# EAGLE board Minimum circuit for arduino (EAGLE 6.5.0)

Size 100 x 80 mm. Coordinates in mm from the lower left corner, seen from the top.
Outline: 0,0 100,0 100,80 0,80 0,0
Copper layers (1*16): Top 0.035mm / dielectric 1.5mm / Bottom 0.035mm
Design rules "default": minimum track width 10mil, minimum drill 24mil, track to track 8mil, track to pad 8mil, pad to pad 8mil, via to via 8mil, smd to smd 8mil, copper to edge 40mil, drill to drill 8mil, minimum pad ring 10mil, minimum via ring 8mil, stop-mask expansion 4mil, vias tented up to drill 0mil, thermal gap 10mil
Net classes: 0 default: width 0.254 mm, clearance 0.254 mm; 1 power: width 0.61 mm, drill 0.61 mm, clearance 0.254 mm; 2 gnd: width 0.305 mm, drill 0.559 mm, clearance 0.254 mm; 3 usbvcc: width 0.508 mm, drill 0.61 mm, clearance 0.254 mm; 4 aref: width 0.406 mm, drill 0.61 mm, clearance 0.254 mm

## Footprints (pad centres in the part's own frame; a part is rotated, then mirrored left to right if it is on the bottom)
C2.5-6 = drill 0.813 pad 1.6 octagon: 1 -1.27,0; 2 1.27,0
C2.5-5 = drill 0.813 pad 1.6 octagon: 1 -1.27,0; 2 1.27,0
C2.5-4 = drill 0.813 pad 1.6 octagon: 1 -1.27,0; 2 1.27,0
TO220H = drill 1.118 long: 1 -2.54,-10.16; 2 0,-10.16; 3 2.54,-10.16 | hole 3.302: 0,4.826
DCJ0202 = drill 1 pad 2 long: 1 0,3.1; 2 4.8,0; 3 0,-3
1X03 = drill 1.016 long: 1 -2.54,0; 2 0,0; 3 2.54,0
1X08 = drill 1.016 long: 1 -8.89,0; 2 -6.35,0; 3 -3.81,0; 4 -1.27,0; 5 1.27,0; 6 3.81,0; 7 6.35,0; 8 8.89,0
1X06 = drill 1.016 long: 1 -6.35,0; 2 -3.81,0; 3 -1.27,0; 4 1.27,0; 5 3.81,0; 6 6.35,0
2X03 = drill 1.016 octagon: 1 -2.54,-1.27; 2 -2.54,1.27; 3 0,-1.27; 4 0,1.27; 5 2.54,-1.27; 6 2.54,1.27
LED5MM = drill 0.813 octagon: A -1.27,0; K 1.27,0
0309/12 = drill 0.813 octagon: 1 -6.35,0; 2 6.35,0
0207/10 = drill 0.813 octagon: 1 -5.08,0; 2 5.08,0
B3F-10XX = drill 1.016 long: 1 -3.251,2.261; 2 3.251,2.261; 3 -3.251,-2.261; 4 3.251,-2.261
PN61729-S = drill 0.95 octagon: 1 1.25,4.71; 2 -1.25,4.71; 3 -1.25,2.71; 4 1.25,2.71 | drill 2.3 pad 2.9: S1 -6.02,0; S2 6.02,0
DIL28-3 = drill 0.85 pad 1.422 long: 1 -16.51,-3.81; 2 -13.97,-3.81; 3 -11.43,-3.81; 4 -8.89,-3.81; 5 -6.35,-3.81; 6 -3.81,-3.81; 7 -1.27,-3.81; 8 1.27,-3.81; 9 3.81,-3.81; 10 6.35,-3.81; 11 8.89,-3.81; 12 11.43,-3.81; 13 13.97,-3.81; 14 16.51,-3.81; 15 16.51,3.81; 16 13.97,3.81; 17 11.43,3.81; 18 8.89,3.81; 19 6.35,3.81; 20 3.81,3.81; 21 1.27,3.81; 22 -1.27,3.81; 23 -3.81,3.81; 24 -6.35,3.81; 25 -8.89,3.81; 26 -11.43,3.81; 27 -13.97,3.81; 28 -16.51,3.81

## Placement (x,y rotation side)
C1  [C2.5-6]  -34.29,45.72 0 top  (outside the outline)
C2  [C2.5-6]  -43.18,45.72 0 top  (outside the outline)
C3  [C2.5-5]  -15.24,44.45 0 top  (outside the outline)
C4  [C2.5-5]  -20.32,44.45 0 top  (outside the outline)
C5  [C2.5-5]  -25.4,44.45 0 top  (outside the outline)
C6  100n  [C2.5-4]  -16.51,38.1 0 top  (outside the outline)
IC1  7805T  [TO220H]  -21.59,12.7 0 top  (outside the outline)
J1  DCJ0202  [DCJ0202]  -52.07,11.43 0 top  (outside the outline)
JP1  [1X03]  -50.8,57.15 0 top  (outside the outline)
JP2  [1X08]  -24.13,50.8 0 top  (outside the outline)
JP3  [1X06]  -21.59,57.15 0 top  (outside the outline)
JP4  [1X08]  -45.72,50.8 0 top  (outside the outline)
JP5  [1X06]  -38.1,57.15 0 top  (outside the outline)
JP6  [2X03]  66.04,39.37 270 top
LED1  [LED5MM]  -36.83,38.1 0 top  (outside the outline)
LED5  [LED5MM]  -49.53,38.1 0 top  (outside the outline)
LED6  [LED5MM]  -62.23,38.1 0 top  (outside the outline)
R1  [0309/12]  -20.32,63.5 0 top  (outside the outline)
R2  [0207/10]  -34.29,62.23 0 top  (outside the outline)
R6  [0207/10]  -46.99,62.23 0 top  (outside the outline)
R7  [0207/10]  -59.69,62.23 0 top  (outside the outline)
RESET  [B3F-10XX]  -59.69,25.4 0 top  (outside the outline)
X1  PN61729-S  [PN61729-S]  -38.1,11.43 0 top  (outside the outline)
ZU4  ATMEGA328P-PU  [DIL28-3]  43.18,30.48 180 top

## Library data of the parts
C1-C6 = capacitor-wima
IC1 = linear
J1 = con-jack; OC_FARNELL: unknown; OC_NEWARK: unknown
JP1-JP6 = pinhead
LED1 LED5 LED6 = led
R1 R2 R7 = rcl
R6 = resistor
RESET = switch-omron; MPN: B3F-1000; OC_FARNELL: 176432; OC_NEWARK: 36M3542
X1 = con-berg; OC_FARNELL: unknown; OC_NEWARK: unknown
ZU4 = SmartPrj

## Nets
A0: JP3.6 ZU4.23
A1: JP3.5 ZU4.24
A2: JP3.4 ZU4.25
A3: JP3.3 ZU4.26
A4: JP3.2 ZU4.27
A5: JP3.1 ZU4.28
AREF [aref]: ZU4.21
D0: JP2.8 JP5.3 ZU4.2
D1: JP2.7 JP5.2 ZU4.3
D2: JP2.6 ZU4.4
D3: JP2.5 ZU4.5
D4: JP2.4 ZU4.6
D5: JP2.3 ZU4.11
D6: JP2.2 ZU4.12
D7: JP2.1 ZU4.13
D8: JP4.8 ZU4.14
D9: JP4.7 ZU4.15
D10: JP4.6 ZU4.16
D11: JP4.5 JP6.4 ZU4.17
D12: JP4.4 JP6.1 ZU4.18
D13: JP4.3 JP6.3 R6.1 ZU4.19
GND [gnd]: C1.1 C2.1 C3.2 C4.2 C6.1 IC1.2 J1.3 JP4.2 JP5.6 JP6.6 LED1.K LED5.K LED6.K RESET.3 RESET.4 X1.4 X1.S1 X1.S2 ZU4.8 ZU4.22
N$2 [usbvcc]: C6.2 ZU4.7 ZU4.20
N$3: C3.1 IC1.1 J1.1
N$6: LED1.A R2.2
N$7: LED5.A R6.2
N$8: LED6.A R7.2
N$15: C5.2 JP5.4
N$16: JP5.5
RESET: C5.1 JP6.5 R1.1 RESET.1 RESET.2 ZU4.1
VCC: C4.1 IC1.3 JP4.1 JP5.1 JP6.2 R1.2 R2.1 R7.1 X1.1
XTAL1: C2.2 JP1.1 ZU4.9
XTAL2: C1.2 JP1.3 ZU4.10

## Tracks (layer width: path | path; a pad name or v marks a point on that pad's centre or on a via)
A0  (1 unrouted)
A1  (1 unrouted)
A2  (1 unrouted)
A3  (1 unrouted)
A4  (1 unrouted)
A5  (1 unrouted)
D0  (2 unrouted)
D1  (2 unrouted)
D2  (1 unrouted)
D3  (1 unrouted)
D4  (1 unrouted)
D5  (1 unrouted)
D6  (1 unrouted)
D7  (1 unrouted)
D8  (1 unrouted)
D9  (1 unrouted)
D10  (1 unrouted)
D11  (2 unrouted)
D12  (2 unrouted)
D13  (3 unrouted)
GND  (19 unrouted)
N$2  (2 unrouted)
N$3  (2 unrouted)
N$6  (1 unrouted)
N$7  (1 unrouted)
N$8  (1 unrouted)
N$15  (1 unrouted)
RESET  (5 unrouted)
VCC  (8 unrouted)
XTAL1  (2 unrouted)
XTAL2  (2 unrouted)